# Altium PCB PCB_stand.PcbDoc
Units mm, origin at the board's own origin, x right, y up, seen from the top; angles counter-clockwise.
Board outline 100 x 100 mm, 2 copper layers (Top Layer, Bottom Layer); 25 components, 20 nets, 103 pads, 0 vias.
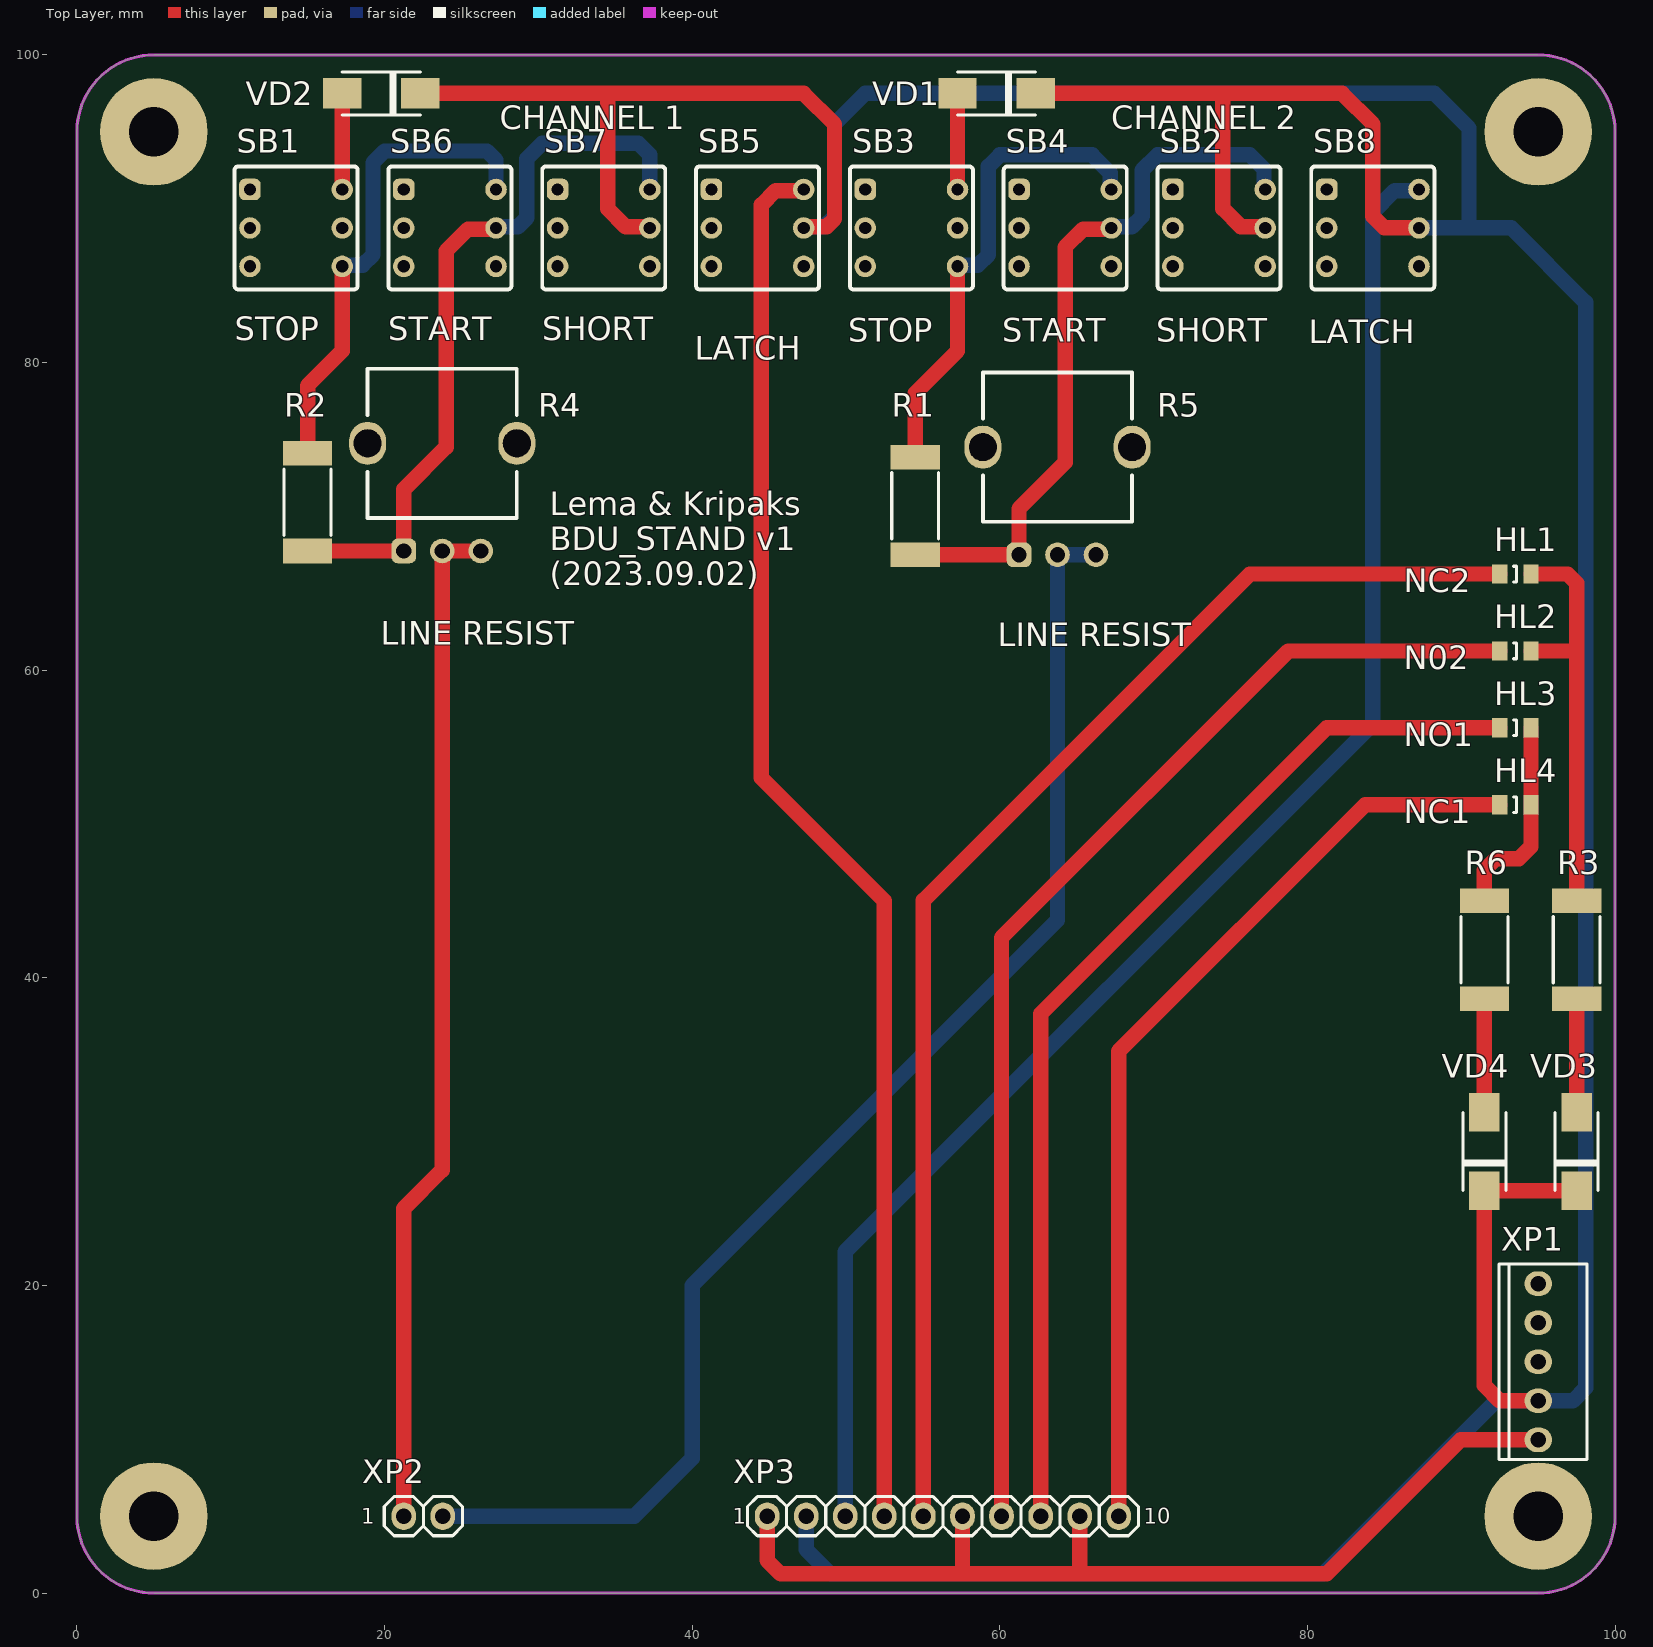
[diagram p0: Top Layer view]
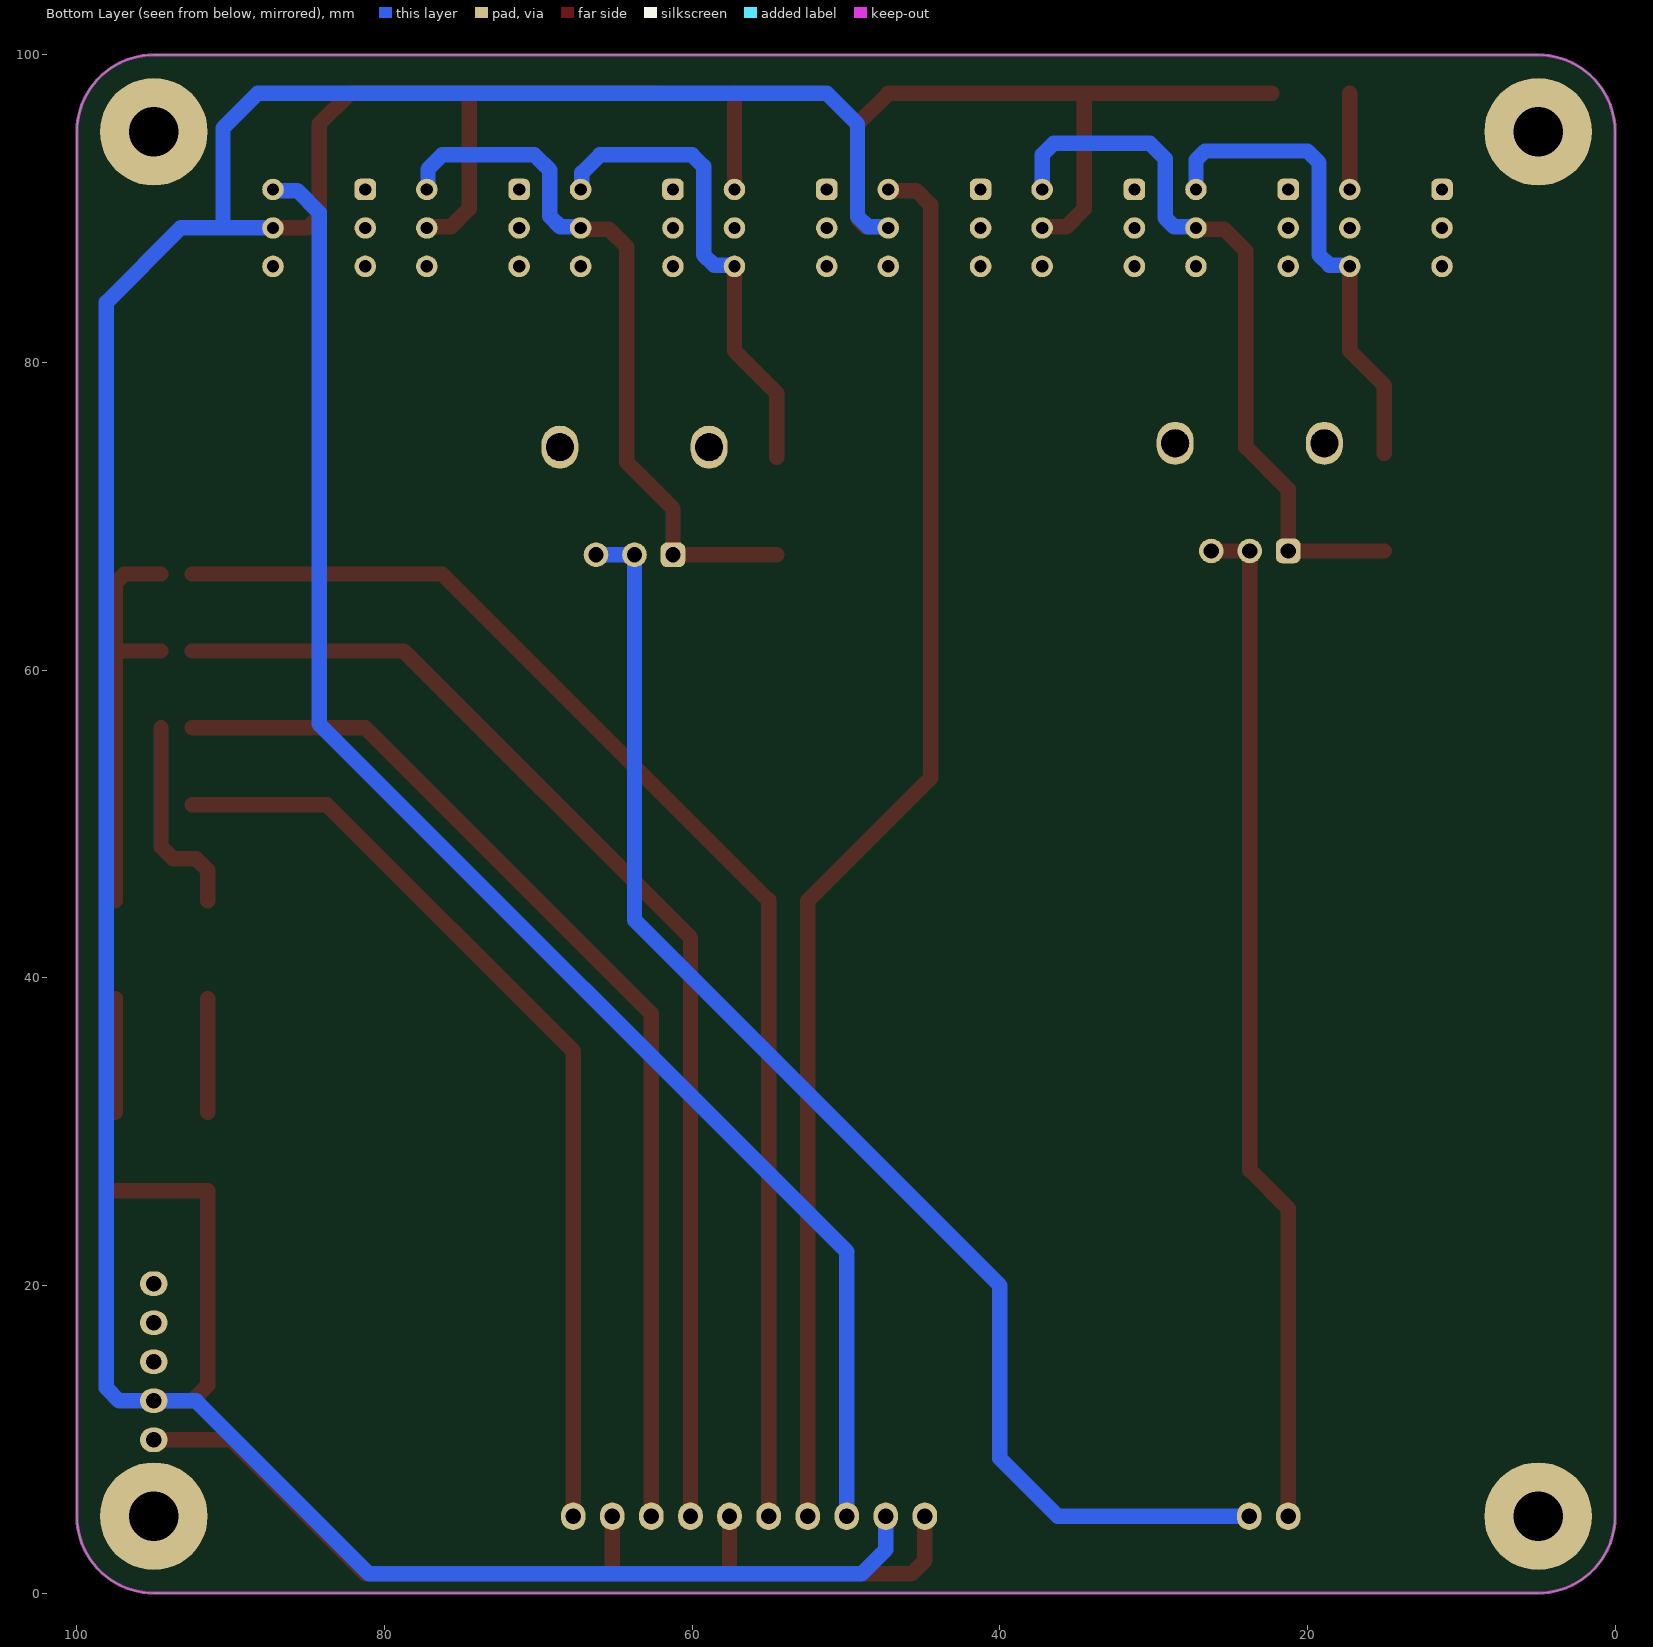
[diagram p1: Bottom Layer view, seen from below]

## Layer stack, top to bottom
Top Solder: solder mask 0.0102, Solder Resist, Dk 3.5
Top Layer: signal copper 0.0356
Dielectric 1: dielectric 0.32, FR-4, Dk 4.8
Bottom Layer: signal copper 0.0356
Bottom Solder: solder mask 0.0102, Solder Resist, Dk 3.5

## Board outline
0,5 0,95 cw(c5,95) 5,100 95,100 cw(c95,95) 100,95 100,5 cw(c95,5) 95,0 5,0 cw(c5,5)

## Design rules (kind name [scope] priority, off if disabled: settings)
Clearance [All] p1: gap=0.5 ignorepadtopadclearanceinfootprint=FALSE
MinimumSolderMaskSliver [All] p1: minsoldermaskwidth=0.002
PolygonConnect [All] p1: connectstyle=Relief reliefconductorwidth=0.254 reliefentries=4 polygonreliefangle="90 Angle" airgapwidth=0.254
RoutingVias [All] p1: holewidth=0.711 width=1.27 viastyle="Through Hole" minholewidth=0.711 minwidth=1.27 maxholewidth=0.711 maxwidth=1.27
ShortCircuit [All] p1: allowed=TRUE
SilkToSilkClearance [All] p1: silktosilkclearance=0.002
SilkToSolderMaskClearance [IsPad] p1: minsilkscreentomaskgap=0.002 clearancetoexposedcopper=TRUE
SolderMaskExpansion [All] p1: expansion=0.102 istentingtop=FALSE
Width [All] p1: maxlimit=1 minlimit=0.25 preferedwidth=0.5 minimp=50.000000 maximp=50.000000 favimp=50.000000
26 further rules are at their usual default settings.

## Components (designator, comment, footprint, x,y, rotation, side; value= is the part's Value field where it differs from the comment)
HL1 "1206 RED" "LED 0805" 92.5,66.25 r0 top
HL2 "1206 GREEN" "LED 0805" 92.5,61.25 r0 top
HL3 "1206 RED" "LED 0805" 92.5,56.25 r0 top
HL4 "1206 GREEN" "LED 0805" 92.5,51.25 r0 top
R1 "47R" "Resistor 2512" 54.5,73.85 r270 top
R2 "47R" "Resistor 2512" 15,74.1 r270 top
R3 "10k" "Resistor 2512" 97.5,38.65 r90 top
R4 "R-0904N-B1K" R-0904N-B1K 23.75,74.75 r0 top
R5 "R-0904N-B1K" R-0904N-B1K 63.75,74.5 r0 top
R6 "10k" "Resistor 2512" 91.5,38.65 r90 top
SB1 "PB22E08 Без фиксации" PB22E08 14.25,88.75 r270 top
SB2 "PB22E08 Без фиксации" PB22E08 74.25,88.75 r270 top
SB3 "PB22E08 Без фиксации" PB22E08 54.25,88.75 r270 top
SB4 "PB22E08 Без фиксации" PB22E08 64.25,88.75 r270 top
SB5 "PB22E08 C фиксации" PB22E08 44.25,88.75 r270 top
SB6 "PB22E08 Без фиксации" PB22E08 24.25,88.75 r270 top
SB7 "PB22E08 Без фиксации" PB22E08 34.25,88.75 r270 top
SB8 "PB22E08 C фиксации" PB22E08 84.25,88.75 r270 top
VD1 "S1M" "DO-214AC SMA" 62.33,97.5 r180 top
VD2 "S1M" "DO-214AC SMA" 22.33,97.5 r180 top
VD3 "S1M" "DO-214AC SMA" 97.5,26.17 r90 top
VD4 "S1M" "DO-214AC SMA" 91.5,26.17 r90 top
XP1 "WF-05R" WF-05 95,9.96 r90 top
XP2 "ZL211-02KG" "Pins 1x2" 21.25,5 r0 top
XP3 "ZL211-10KG" "Pins 1x10" 44.872,5 r0 top

## Footprints (in the part's own frame and the unit in brackets; to place one, negate y for a bottom-side part, rotate by r counter-clockwise, add the part's x,y. Pads: shape width x height; smd on the part's side, far side on the other; paste and mask are expansions set on the pad)
"DO-214AC SMA" [mm]
  rect 2.5x2 smd: 1(5.08,0) 2(0,0)
  silkscreen extent 0,-1.4 5.08,1.4
"LED 0805" [mm]
  rect 1x1.25 smd: 1(0,0) 2(2.032,0)
  silkscreen extent 0.89,-0.51 1.09,0.51
PB22E08 [mm]
  rrect50% 1.4x1.4 hole 0.8: 1(-2.5,-3)
  round 1.4 hole 0.8: 2(0,-3) 3(2.5,-3) 4(-2.5,3) 5(0,3) 6(2.5,3)
  silkscreen extent -4,-4 4,4
"Pins 1x2" [mm]
  oval 1.6x1.8 hole 1: 1(0,0) 2(2.54,0)
  silkscreen extent -1.27,-1.27 3.81,1.27
"Pins 1x10" [mm]
  oval 1.6x1.8 hole 1: 1(0,0) 2(2.54,0) 3(5.08,0) 4(7.62,0) 5(10.16,0) 6(12.7,0) 7(15.24,0) 8(17.78,0) 9(20.32,0) 10(22.86,0)
  silkscreen extent -1.27,-1.27 24.13,1.27
R-0904N-B1K [mm]
  rrect50% 1.6x1.6 hole 1: 1(-2.5,-7)
  round 1.6 hole 1: 2(0,-7) 3(2.5,-7)
  oval 2.4x2.8 hole 1.8: ""(-4.85,0) ""(4.85,0)
  silkscreen extent -4.85,-4.85 4.85,4.85
"Resistor 2512" [mm]
  rect 1.6x3.2 smd: 1(0,0) 2(6.35,0)
  silkscreen extent 1.02,-1.52 5.33,1.52
WF-05 [mm]
  oval 1.6x1.8 hole 1: 1(0,0) 2(2.54,0) 3(5.08,0) 4(7.62,0) 5(10.16,0)
  silkscreen extent -1.27,-3.17 11.43,2.54

## Part data
HL1 HL2 HL3 HL4: library part LED
R1 R2 R3 R6: library part "Resistor 1W"
SB1 SB2 SB3 SB4 SB6 SB7: library part PB22E08(Non)
SB5 SB8: library part PB22E08
XP1: library part "Pins 1x5"
XP2: library part "Pins 1x2", Name1=CH1, Name2=CH2
XP3: library part "Pins 1x10", Name1=18V, Name2=COM, Name3=LATCH2, Name4=LATCH1, Name5=NC2, Name6=COM2, Name7=NO2, Name8=NO1, Name9=COM1, Name10=NC2

## Free pads (board coordinates)
  round 7 hole 3.2: 0(5,5) 0(5,95) 0(95,5) 0(95,95)

## Nets (pads, with @x,y where several pads share a name; then routed paths per layer and width w, separated by ;. In a path a pad name is that pad's centre, name@x,y a point inside that pad or via, vN(x,y) a via of type N, cw(c..) or ccw(c..) an arc to the next point about the centre after c; other vN are vias at no path point)
NetHL1_1: HL1.1 XP3.5 | length 86.3
  Top Layer w1: XP3.5 55.032,45.032 76.25,66.25 HL1.1
NetHL1_2: HL1.2 HL2.2 R3.2 | length 26.8
  Top Layer w1: HL2.2 97.5,61.25 ; HL1.2 96.914,66.25 97.5,65.664 97.5,61.25 ; R3.2 97.5,61.25
NetHL2_1: HL2.1 XP3.7 | length 77.7
  Top Layer w1: XP3.7 60.112,42.612 78.75,61.25 HL2.1
NetHL3_1: HL3.1 XP3.8 | length 70.2
  Top Layer w1: XP3.8 62.652,37.652 81.25,56.25 HL3.1
NetHL3_2: HL3.2 HL4.2 R6.2 | length 13.4
  Top Layer w1: R6.2 91.5,47 92.25,47.75 93.75,47.75 94.532,48.532 HL4.2 HL3.2
NetHL4_1: HL4.1 XP3.10 | length 61.6
  Top Layer w1: XP3.10 67.732,35.232 83.75,51.25 HL4.1
NetR1_1: R1.1 SB3.6 SB4.4 | length 31.4
  Top Layer w1: R1.1 54.5,78 57.25,80.75 SB3.6
  Bottom Layer w1: SB3.6 57.327,86.327 58.577,86.327 59.25,87 59.25,92.75 60,93.5 66,93.5 67.173,92.327 67.173,91.327 SB4.4
NetR1_2: R1.2 R5.1 SB2.4 SB4.5 | length 46.9
  Top Layer w1: R1.2 R5.1 61.25,70.5 64.25,73.5 64.25,87.5 65.423,88.673 67.173,88.673 SB4.5
  Bottom Layer w1: SB4.5 67.327,88.827 68.577,88.827 69.25,89.5 69.25,92.5 70.25,93.5 76.25,93.5 77.173,92.577 77.173,91.327 SB2.4
NetR2_1: R2.1 SB1.6 SB6.4 | length 31.9
  Top Layer w1: R2.1 15,78.5 17.25,80.75 SB1.6
  Bottom Layer w1: SB1.6 17.327,86.327 18.577,86.327 19.25,87 19.25,93 20,93.75 26.664,93.75 27.25,93.164 SB6.4
NetR2_2: R2.2 R4.1 SB6.5 SB7.4 | length 47.8
  Top Layer w1: R2.2 R4.1 21.25,71.75 24,74.5 24,87.25 25.423,88.673 27.173,88.673 SB6.5
  Bottom Layer w1: SB6.5 27.327,88.827 28.664,88.827 29.25,89.412 29.25,93.25 30.25,94.25 36.5,94.25 37.25,93.5 SB7.4
NetR3_1: R3.1 VD3.1 | length 7.4
  Top Layer w1: VD3.1 R3.1
NetR4_2: R4.2 R4.3 XP2.1 | length 66.3
  Top Layer w1: XP2.1 21.25,25 23.75,27.5 R4.2 R4.3
NetR5_2: R5.2 R5.3 XP2.2 | length 88.9
  Bottom Layer w1: XP2.2 36.25,5 40,8.75 40,20 63.75,43.75 R5.2 R5.3
NetR6_1: R6.1 VD4.1 | length 7.4
  Top Layer w1: VD4.1 R6.1
NetSB1_4: SB1.4 VD2.1 | length 6.3
  Top Layer w1: SB1.4 VD2.1
NetSB2_5: SB2.5 SB5.5 SB7.5 SB8.5 VD1.2 VD2.2 VD3.2 VD4.2 XP1.2 XP3.2 | length 312.1
  Top Layer w1: VD2.2 34.5,97.5 ; SB7.5 37.173,88.827 35.673,88.827 34.5,90 34.5,97.5 ; SB5.5 47.327,88.827 48.741,88.827 49.25,89.336 49.25,95.5 47.25,97.5 34.5,97.5 ; VD1.2 74.5,97.5 ; SB2.5 77.173,88.827 75.673,88.827 74.5,90 74.5,97.5 ; SB8.5 85,88.75 84.25,89.5 84.25,95.5 82.25,97.5 74.5,97.5 ; XP1.2 92.5,12.5 91.5,13.5 VD4.2 VD3.2
  Bottom Layer w1: SB5.5 47.327,88.827 48.577,88.827 49.25,89.5 49.25,95.5 51.25,97.5 88.25,97.5 90.5,95.25 90.5,88.75 ; XP3.2 47.412,2.838 49,1.25 81,1.25 92.25,12.5 XP1.2 97.25,12.5 98.086,13.336 98.086,83.914 93.25,88.75 90.5,88.75 ; SB8.5 90.5,88.75
NetSB3_4: SB3.4 VD1.1 | length 6.3
  Top Layer w1: SB3.4 VD1.1
NetSB5_4: SB5.4 XP3.4 | length 91.7
  Top Layer w1: SB5.4 47.173,91.173 45.423,91.173 44.5,90.25 44.5,53 52.492,45.008 XP3.4
NetSB8_4: SB8.4 XP3.3 | length 102.6
  Bottom Layer w1: XP3.3 49.952,22.202 84.25,56.5 84.25,89.75 85.673,91.173 87.173,91.173 SB8.4
NetXP1_1: XP1.1 XP3.1 XP3.6 XP3.9 | length 64.6
  Top Layer w1: XP3.1 44.872,2.128 45.75,1.25 57.5,1.25 ; XP3.6 57.572,1.322 57.5,1.25 ; XP3.9 65.192,1.442 65,1.25 ; XP1.1 89.96,9.96 81.25,1.25 65,1.25 ; 57.5,1.25 65,1.25
pads on no net: R4. R5. SB1.1 SB1.2 SB1.3 SB1.5 SB2.1 SB2.2 SB2.3 SB2.6 SB3.1 SB3.2 SB3.3 SB3.5 SB4.1 SB4.2 SB4.3 SB4.6 SB5.1 SB5.2 SB5.3 SB5.6 SB6.1 SB6.2 SB6.3 SB6.6 SB7.1 SB7.2 SB7.3 SB7.6 SB8.1 SB8.2 SB8.3 SB8.6 XP1.3 XP1.4 XP1.5

## Keep-outs
Keep-Out Layer:
  the board outline again, w0.2

## Silkscreen, mask and mechanical layers (free items; w line width, h text height)
Top Overlay:
  text "CHANNEL 1" at 27.5,95.164 h1.52
  text "CHANNEL 2" at 67.25,95.164 h1.52
  text "STOP" at 10.25,81.438 h1.52
  text "START" at 20.25,81.438 h1.52
  text "SHORT" at 30.25,81.438 h1.52
  text "STOP" at 50.161,81.358 h1.52
  text "START" at 60.161,81.358 h1.52
  text "SHORT" at 70.161,81.358 h1.52
  text "LATCH" at 80.088,81.24 h1.52
  text "LATCH" at 40.176,80.174 h1.52
  text "Lema & Kripaks / BDU_STAND v1 / (2023.09.02)" at 30.75,65.509 h1.52
  text "NC2" at 86.25,65.061 h1.52
  text "LINE RESIST" at 19.75,61.664 h1.52
  text "LINE RESIST" at 59.859,61.558 h1.52
  text "N02" at 86.25,60.061 h1.52
  text "NO1" at 86.25,55.061 h1.52
  text "NC1" at 86.25,50.061 h1.52

## Text inside footprints (layer, text, board x,y; h text height)
XP2: Top Overlay "1" at 18.5,4.5 h1
XP3: Top Overlay "10" at 69.372,4.5 h1; Top Overlay "1" at 42.622,4.5 h1